# EAGLE board d11_micro_std_vcp (EAGLE 7.3.0)
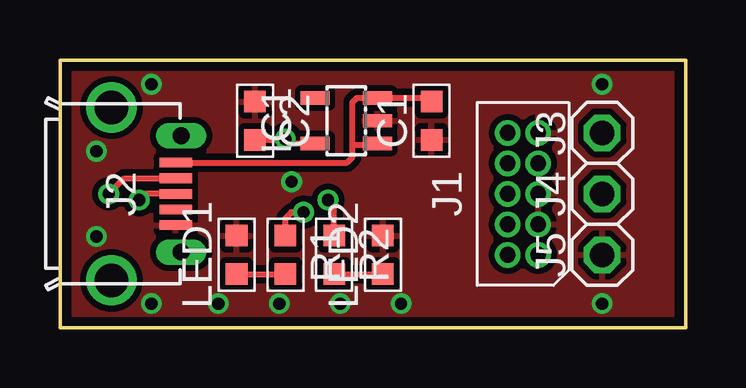
[diagram p0: board, top side]
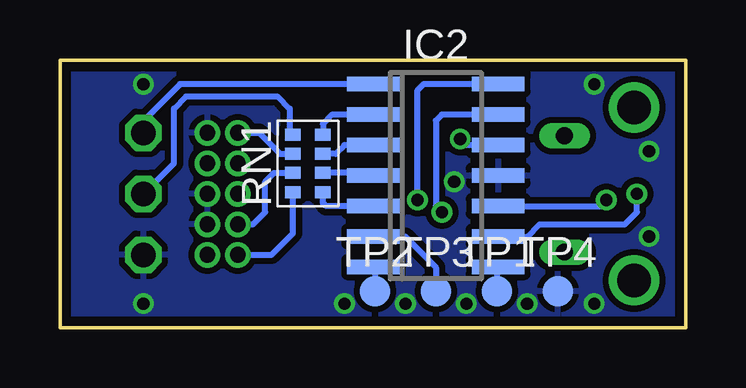
[diagram p1: board, bottom side, seen from below]

Size 26.09 x 11.17 mm. Coordinates in mm from the lower left corner, seen from the top.
Outline: 0,0 26.09,0 26.09,11.17 0,11.17 0,0
Copper layers (1*16): Top 0.0356mm / dielectric 1.5011mm / Bottom 0.0356mm
Design rules "OSHPark *": minimum track width 6mil, minimum drill 13mil, track to track 6mil, track to pad 6mil, pad to pad 6mil, via to via 6mil, smd to smd 6mil, copper to edge 15mil, drill to drill 6mil, minimum pad ring 7mil, minimum via ring 7mil, stop-mask expansion 3mil, vias tented up to drill 100mil, thermal gap 10mil

## Footprints (pad centres in the part's own frame; a part is rotated, then mirrored left to right if it is on the bottom)
SMD0603 = smd 0.9 x 0.9: 1 -0.8,0; 2 0.8,0
SOT23-5 = smd 0.55 x 1.2: 1 -0.95,-1.3; 2 0,-1.3; 3 0.95,-1.3; 4 0.95,1.3; 5 -0.95,1.3
SO-14 = smd 0.6 x 2.2: 1 -3.81,-2.6; 2 -2.54,-2.6; 3 -1.27,-2.6; 4 0,-2.6; 5 1.27,-2.6; 6 2.54,-2.6; 7 3.81,-2.6; 8 3.81,2.6; 9 2.54,2.6; 10 1.27,2.6; 11 0,2.6; 12 -1.27,2.6; 13 -2.54,2.6; 14 -3.81,2.6
HEADER-5X2-1.27MM = drill 0.66 pad 1.067: 1 -2.54,-0.635; 2 -2.54,0.635; 3 -1.27,-0.635; 4 -1.27,0.635; 5 0,-0.635; 6 0,0.635; 7 1.27,-0.635; 8 1.27,0.635; 9 2.54,-0.635; 10 2.54,0.635
USB-B-MICRO-SMT-SHELL-TH = smd 1.35 x 0.4: 1 4.825,1.3; 2 4.825,0.65; 3 4.825,0; 4 4.825,-0.65; 5 4.825,-1.3 | drill 1.397: M1 2.15,-3.6; M2 2.15,3.6 | drill 0.7 long: M3 5.05,2.425; M4 5.05,-2.425
PIN-TH = drill 1.016 octagon: 1 0,0
SMD0603-X4 = smd 0.5 x 0.65: 1 -1.2,-0.625; 2 -0.4,-0.625; 3 0.4,-0.625; 4 1.2,-0.625; 5 1.2,0.625; 6 0.4,0.625; 7 -0.4,0.625; 8 -1.2,0.625
TP-1.27MM = smd 1.27 x 1.27: 1 0,0

## Placement (x,y rotation side)
C1  1uF  [SMD0603]  15.49,8.64 90 top
C2  1uF  [SMD0603]  8.13,8.64 270 top
IC1  MIC5504-3.3  [SOT23-5]  11.94,8.64 90 top
IC2  ATSAMD11C  [SO-14]  10.41,6.35 270 bottom
J1  HEADER-5X2-TH-1.27  [HEADER-5X2-1.27MM]  19.3,5.59 90 top
J2  [USB-B-MICRO-SMT-SHELL-TH]  0,5.59 0 top
J3  RX  [PIN-TH]  22.61,8.13 90 top
J4  TX  [PIN-TH]  22.61,5.59 90 top
J5  GND  [PIN-TH]  22.61,3.05 90 top
LED1  [SMD0603]  7.37,3.05 90 top
LED2  [SMD0603]  13.46,3.05 90 top
R1  470  [SMD0603]  9.4,3.05 270 top
R2  470  [SMD0603]  11.43,3.05 270 top
RN1  100  [SMD0603-X4]  15.75,6.86 90 bottom
TP1  SIO  [TP-1.27MM]  7.87,1.52 0 bottom
TP2  [TP-1.27MM]  12.95,1.52 0 bottom
TP3  [TP-1.27MM]  10.41,1.52 0 bottom
TP4  [TP-1.27MM]  5.33,1.52 0 bottom

## Library data of the parts
C1 C2 R1 R2 RN1 = ataradov_rlc
IC1 = ataradov_vreg
IC2 = ataradov_mcu
J1-J5 = ataradov_conn
LED1 LED2 = ataradov_led
TP1-TP4 = ataradov_misc

## Nets
+3V3: C2.2 IC1.5 IC2.12
GND: C1.1 C2.1 IC1.2 IC2.11 J1.3 J1.5 J1.9 J2.5 J5.1 LED1.2 LED2.2 TP4.1
N$1: IC2.9 J2.2
N$2: IC2.10 J2.3
N$4: LED1.1 R1.2
N$6: LED2.1 R2.2
PA02: IC2.13 R1.1
PA04: IC2.14 R2.1
PA08: IC2.2 RN1.4
PA09: IC2.3 RN1.3
PA14: IC2.4 RN1.2
PA15: IC2.5 RN1.1
RESET: IC2.6 TP3.1
SWCLK: IC2.7 TP2.1
SWDIO: IC2.8 TP1.1
T_RESET: J1.10 RN1.6
T_SWCLK: J1.4 RN1.7
T_SWDIO: J1.2 RN1.8
UART_RX: IC2.1 J3.1
UART_TX: J4.1 RN1.5
V_USB: C1.2 IC1.1 IC1.3 J2.1

## Tracks (layer width: path | path; a pad name or v marks a point on that pad's centre or on a via)
+3V3  (via drill 0.51 pad 0.25)
  Top 0.254: IC1.5 9.59,7.69 v9.4,7.87 9.36,7.84 C2.2
  Bottom 0.254: IC2.12 9.14,7.62 v9.4,7.87
GND  (via drill 0.51 pad 0.25)
  other vias: 1.52,7.37 11.68,1.02 22.61,10.16 1.52,3.81 9.14,1.02 3.81,10.16 3.81,1.02 22.61,1.02 6.6,1.02 14.22,1.02 9.65,6.1
  pour Bottom (isolate 0.254): 0,11.18 26.16,11.18 26.16,0 0,0
  pour Top (isolate 0.254): 0,11.18 26.16,11.18 26.16,0 0,0
N$1  (via drill 0.51 pad 0.25)
  Top 0.254: v2.03,5.59 2.68,6.24 J2.2
  Bottom 0.254: IC2.9 6.6,3.81 6.1,4.32 2.54,4.32 2.03,4.83 v2.03,5.59
N$2  (via drill 0.51 pad 0.25)
  Top 0.254: J2.3 3.56,5.59 v3.3,5.33
  Bottom 0.254: IC2.10 3.56,5.08 v3.3,5.33
N$4
  Top 0.254: LED1.1 R1.2
N$6
  Top 0.254: R2.2 LED2.1
PA02  (via drill 0.51 pad 0.51)
  Top 0.254: R1.1 9.4,4.57 9.65,4.83 v10.16,4.83
  Bottom 0.254: v10.16,4.83 10.41,5.08 10.41,8.64 10.16,8.89 IC2.13
PA04  (via drill 0.51 pad 0.51)
  Top 0.254: R2.1 11.43,5.08 v11.18,5.33
  Bottom 0.254: v11.18,5.33 11.18,9.91 10.92,10.16 IC2.14
PA08
  Bottom 0.254: IC2.2 14.73,8.89 15.12,8.5 RN1.4
PA09
  Bottom 0.254: IC2.3 14.22,7.62 14.59,7.26 RN1.3
PA14
  Bottom 0.254: IC2.4 13.12,6.46 RN1.2
PA15
  Bottom 0.254: IC2.5 14.99,5.08 15.12,5.22 RN1.1
RESET
  Bottom 0.254: IC2.6 11.68,3.81 10.41,2.54 TP3.1
SWCLK
  Bottom 0.254: IC2.7 12.95,2.48 TP2.1
SWDIO
  Bottom 0.254: IC2.8 7.87,2.48 TP1.1
T_RESET
  Bottom 0.254: J1.10 17.78,8.13 16.91,7.26 RN1.6
T_SWCLK
  Bottom 0.254: J1.4 18.03,4.32 17.53,4.83 17.53,6.1 17.16,6.46 RN1.7
T_SWDIO
  Bottom 0.254: J1.2 17.27,3.05 16.37,3.95 RN1.8
UART_RX
  Bottom 0.254: IC2.1 21.08,10.16 22.61,8.64 J3.1
UART_TX
  Bottom 0.254: J4.1 21.34,6.86 21.34,9.14 20.83,9.65 17.02,9.65 16.51,9.14 16.51,8.2 RN1.5
V_USB
  Top 0.254: J2.1 11.97,6.89 12.19,7.11 12.19,7.62 | 12.19,7.62 12.19,9.4 12.38,9.59 IC1.3 15.34,9.59 C1.2 | IC1.1 13.17,7.62 12.19,7.62

## Text on the board
tValues: 1
bValues: 4/13/19 | AT